# EAGLE board po6030k_plytka (EAGLE 4.13)
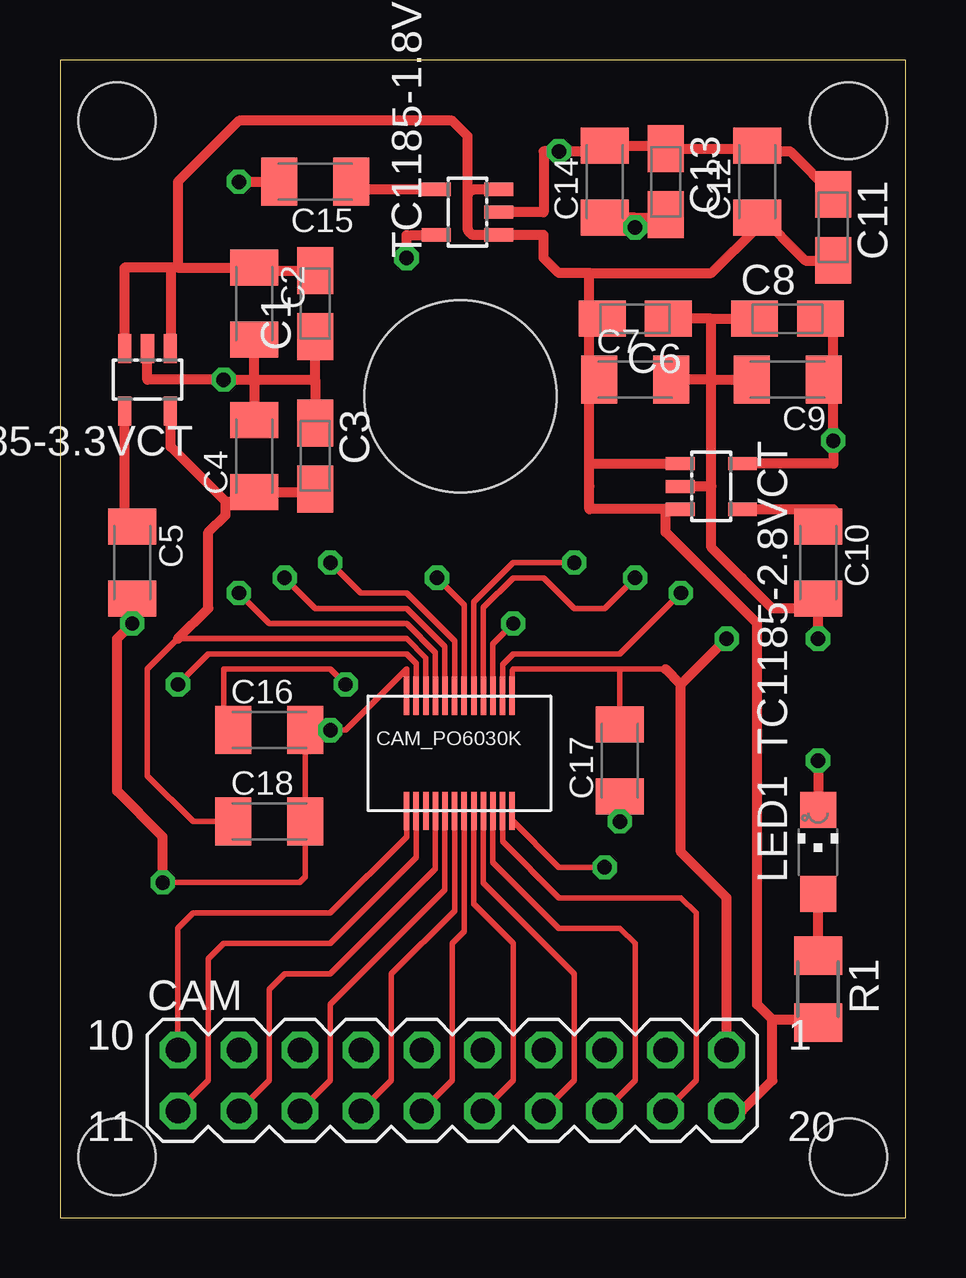
[diagram p0: board, top side]
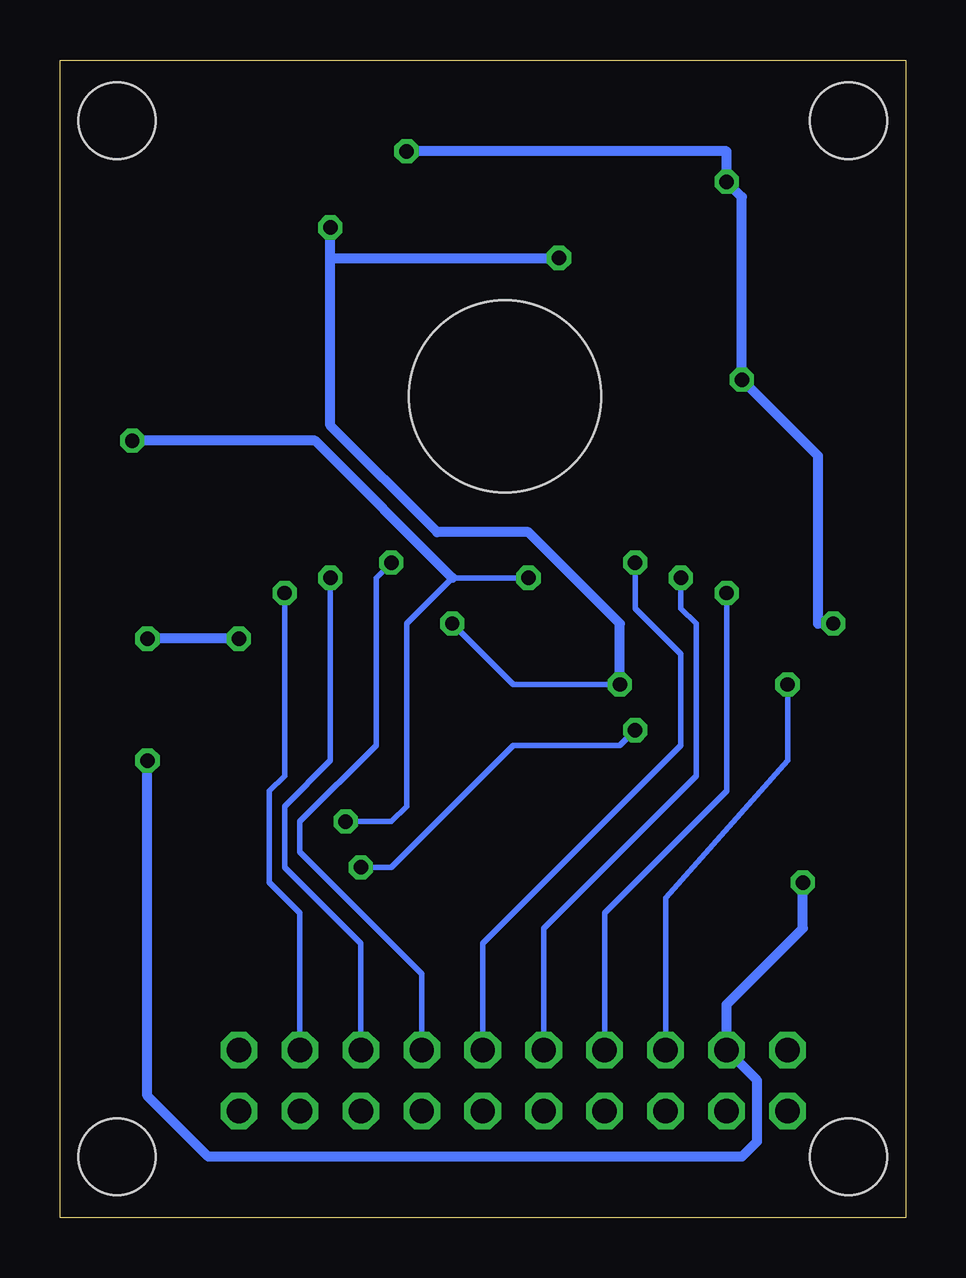
[diagram p1: board, bottom side, seen from below]

Size 35.23 x 48.25 mm. Coordinates in mm from the lower left corner, seen from the top.
Outline: 0,0 35.23,0 35.23,48.25 0,48.25 0,0
Copper layers (1*16): Top 0.035mm / dielectric 1.5mm / Bottom 0.035mm
Design rules "default": minimum track width 9mil, minimum drill 24mil, track to track 10mil, track to pad 10mil, pad to pad 8mil, via to via 8mil, smd to smd 0mil, copper to edge 40mil, drill to drill 8mil, minimum pad ring 10mil, minimum via ring 8mil, stop-mask expansion 4mil, vias tented up to drill 0mil, thermal gap 10mil
Holes 8 mm at 16.68,34.23
Holes 3.2 mm at 32.85,45.72 32.85,2.54 2.38,2.54 2.38,45.72

## Footprints (pad centres in the part's own frame; a part is rotated, then mirrored left to right if it is on the bottom)
A/3216-18R = smd 1.95 x 1.5: + 1.375,0; - -1.375,0
C1206K = smd 1.5 x 2: 1 -1.5,0; 2 1.5,0
MA10-2V2 = drill 1.016 octagon: 1 11.43,1.27; 2 8.89,1.27; 3 6.35,1.27; 4 3.81,1.27; 5 1.27,1.27; 6 -1.27,1.27; 7 -3.81,1.27; 8 -6.35,1.27; 9 -8.89,1.27; 10 -11.43,1.27; 11 -11.43,-1.27; 12 -8.89,-1.27; 13 -6.35,-1.27; 14 -3.81,-1.27; 15 -1.27,-1.27; 16 1.27,-1.27; 17 3.81,-1.27; 18 6.35,-1.27; 19 8.89,-1.27; 20 11.43,-1.27
KYOCERA24 = smd 0.23 x 1.6: P$1 4.4,0.8; P$2 4,0.8; P$3 3.6,0.8; P$4 3.2,0.8; P$5 2.8,0.8; P$6 2.4,0.8; P$7 2,0.8; P$8 1.6,0.8; P$9 1.2,0.8; P$10 0.8,0.8; P$11 0.4,0.8; P$12 0,0.8; P$13 0,-4; P$14 0.4,-4; P$15 0.8,-4; P$16 1.2,-4; P$17 1.6,-4; P$18 2,-4; P$19 2.4,-4; P$20 2.8,-4; P$21 3.2,-4; P$22 3.6,-4; P$23 4,-4; P$24 4.4,-4
CHIPLED_1206 = smd 1.5 x 1.5: A 0,-1.75; C 0,1.75
M1206 = smd 1.6 x 2: 1 -1.4,0; 2 1.4,0
SOT23-5 = smd 0.55 x 1.2: 1 -0.95,-1.3; 2 0,-1.3; 3 0.95,-1.3; 4 0.95,1.3; 5 -0.95,1.3

## Placement (x,y rotation side)
C1  1uF  [A/3216-18R]  10.63,38.09 90 top
C2  100nF  [C1206K]  8.09,38.09 270 top
C3  1uF  [A/3216-18R]  10.63,31.75 270 top
C4  100nF  [C1206K]  8.09,31.75 90 top
C5  450pF  [C1206K]  3.01,27.3 270 top
C6  1uF  [A/3216-18R]  23.96,37.46 180 top
C7  100nF  [C1206K]  23.96,34.92 0 top
C8  1uF  [A/3216-18R]  30.31,37.46 0 top
C9  100nF  [C1206K]  30.31,34.92 180 top
C10  450pF  [C1206K]  31.59,27.3 270 top
C11  1uF  [A/3216-18R]  32.22,41.27 270 top
C12  100nF  [C1206K]  29.04,43.17 90 top
C13  1uF  [A/3216-18R]  25.23,43.17 270 top
C14  100nF  [C1206K]  22.7,43.17 90 top
C15  450pF  [C1206K]  10.63,43.17 180 top
C16  100nF  [C1206K]  8.72,20.32 0 top
C17  100nF  [C1206K]  23.33,19.04 90 top
C18  100nF  [C1206K]  8.72,16.5 0 top
CAM  PO6030  [MA10-2V2]  16.34,5.71 0 top
CAM_PO6030K  CAM_PO6030K  [KYOCERA24]  14.44,20.95 0 top
LED1  [CHIPLED_1206]  31.59,15.24 0 top
R1  512  [M1206]  31.59,9.52 270 top
TC1185-1.8VCT  1.8V  [SOT23-5]  16.98,41.91 90 top
TC1185-2.8VCT  2.8V  [SOT23-5]  27.14,30.47 270 top
TC1185-3.3VCT  3.3V  [SOT23-5]  3.65,34.92 180 top

## Library data of the parts
C1-C18 R1 = rcl
CAM = con-lstb
CAM_PO6030K = moje_elementy
LED1 = led
TC1185-1.8VCT TC1185-2.8VCT TC1185-3.3VCT = v-reg-micrel

## Nets
+5V: C1.+ C2.1 C6.+ C7.1 C11.+ C12.1 CAM.20 R1.2 TC1185-1.8VCT.1 TC1185-1.8VCT.3 TC1185-2.8VCT.1 TC1185-2.8VCT.3 TC1185-3.3VCT.1 TC1185-3.3VCT.3
AGND: C6.- C7.2 C8.- C9.2 C10.2 C17.2 CAM.1 CAM_PO6030K.P$1 TC1185-2.8VCT.2
AGND2: CAM.10 CAM_PO6030K.P$13
AVDD: C8.+ C9.1 C17.1 CAM_PO6030K.P$6 TC1185-2.8VCT.5
D0: CAM.19 CAM_PO6030K.P$23
D1: CAM.18 CAM_PO6030K.P$22
D2: CAM.17 CAM_PO6030K.P$21
D3: CAM.16 CAM_PO6030K.P$20
D4: CAM.15 CAM_PO6030K.P$19
D5: CAM.14 CAM_PO6030K.P$18
D6: CAM.13 CAM_PO6030K.P$17
D7: CAM.12 CAM_PO6030K.P$16
DGND: C1.- C2.2 C3.- C4.2 C5.2 C11.- C12.2 C13.- C14.2 C15.2 C16.2 C18.2 CAM.9 CAM_PO6030K.P$12 CAM_PO6030K.P$24 LED1.C TC1185-1.8VCT.2 TC1185-3.3VCT.2
DVDD: C13.+ C14.1 C16.1 CAM_PO6030K.P$3 TC1185-1.8VCT.5
HSYNC: CAM.3 CAM_PO6030K.P$4
HVDD: C3.+ C4.1 C18.1 CAM_PO6030K.P$10 TC1185-3.3VCT.5
MCLK: CAM.2 CAM_PO6030K.P$2
N$2: C10.1 TC1185-2.8VCT.4
N$3: C15.1 TC1185-1.8VCT.4
N$9: LED1.A R1.1
N$26: C5.1 TC1185-3.3VCT.4
PCLK: CAM.8 CAM_PO6030K.P$11
RSTB: CAM.11 CAM_PO6030K.P$14
SCL: CAM.5 CAM_PO6030K.P$7
SDA: CAM.6 CAM_PO6030K.P$8
STDBY: CAM.4 CAM_PO6030K.P$5
VSYNC: CAM.7 CAM_PO6030K.P$9

## Tracks (layer width: path | path; a pad name or v marks a point on that pad's centre or on a via)
+5V
  Top 0.406: TC1185-3.3VCT.3 2.68,39.59 4.61,39.59 4.61,39.57 | TC1185-3.3VCT.1 | TC1185-3.3VCT.1 | 4.61,39.57 TC1185-3.3VCT.1 | 8.09,39.47 C2.1 4.92,39.59 | 8.09,39.47 C1.+ | 8.09,39.47 8.09,39.37 | 4.92,39.59 4.61,39.59 4.61,39.57 | 25.23,29.53 22.06,29.53 22.06,30.47 | 25.23,29.53 TC1185-2.8VCT.3 | TC1185-2.8VCT.1 22.06,31.43 22.06,30.47 | 22.06,30.47 22.06,34.92 | 22.06,34.92 C7.1 | 22.06,34.92 22.06,37.46 | 22.7,37.46 C6.+ 22.06,37.46 | TC1185-1.8VCT.3 17.29,42.86 arc90 16.98,42.54 16.98,41.27 | 16.98,41.27 arc90 17.29,40.95 TC1185-1.8VCT.1 20.16,40.95 20.16,40 20.79,39.37 22.06,39.37 | CAM.20 28.41,4.44 29.68,5.71 29.68,8.25 | 29.68,8.25 29.04,8.89 29.04,24.76 25.23,28.57 25.23,29.53 | 22.06,39.37 27.14,39.37 29.04,41.27 C12.1 29.04,41.91 31.05,39.9 C11.+ | 22.06,37.46 22.06,39.37 | 16.98,41.27 16.98,45.08 16.34,45.72 7.46,45.72 4.92,43.17 4.92,39.59 | R1.2 31.59,7.61 30.95,8.25 29.68,8.25
AGND  (via drill 0.6)
  Top 0.229: CAM_PO6030K.P$1 18.84,22.81 18.88,22.86 23.33,22.86 | 23.33,20.32 C17.2 23.33,22.86 | 25.23,22.86 23.33,22.86
  Top 0.406: 27.14,30.47 TC1185-2.8VCT.2 | 27.14,30.47 27.14,34.92 | 25.23,34.92 C7.2 27.14,34.92 | 27.14,37.46 C6.- | 27.14,34.92 27.14,37.46 | 27.14,37.46 C8.- | 27.14,34.92 C9.2 | 27.14,30.47 27.14,27.93 28.41,26.67 29.68,25.39 31.59,25.39 | C10.2 32.22,25.39 31.59,25.39 | CAM.1 27.77,13.33 25.87,15.24 25.87,22.22 | 25.87,22.22 25.23,22.86 | v31.59,24.13 31.59,25.39 | 25.87,22.22 v27.77,24.13
  Bottom 0.406: v27.77,24.13 v31.59,24.13
AGND2
  Top 0.229: CAM_PO6030K.P$13 14.44,15.87 11.27,12.7 5.55,12.7 4.92,12.06 CAM.10
AVDD  (via drill 0.6)
  Top 0.229: v23.33,16.5 C17.1 | CAM_PO6030K.P$6 16.84,25.54 v15.71,26.67
  Top 0.406: TC1185-2.8VCT.5 32.22,31.43 v32.22,32.38 32.22,34.92 | 32.22,34.92 C9.1 | 32.22,34.92 32.22,37.46 C8.+ 31.59,37.46
  Bottom 0.229: v15.71,26.67 18.88,26.67 20.79,24.76 20.79,17.14 21.43,16.5 v23.33,16.5
  Bottom 0.406: v32.22,32.38 24.6,32.38 18.88,26.67
D0
  Top 0.229: CAM_PO6030K.P$23 18.44,15.68 20.79,13.33 25.87,13.33 26.5,12.7 26.5,5.71 CAM.19
D1
  Top 0.229: CAM_PO6030K.P$22 18.04,14.81 20.79,12.06 23.33,12.06 23.96,11.43 23.96,5.71 CAM.18
D2
  Top 0.229: CAM_PO6030K.P$21 17.64,13.94 21.43,10.15 21.43,5.71 CAM.17
D3
  Top 0.229: CAM_PO6030K.P$20 17.24,13.07 18.88,11.43 18.88,5.71 CAM.16
D4
  Top 0.229: CAM_PO6030K.P$19 16.84,11.92 16.34,11.43 16.34,5.71 CAM.15
D5
  Top 0.229: CAM_PO6030K.P$18 16.44,12.79 13.8,10.15 13.8,5.71 CAM.14
D6
  Top 0.229: CAM_PO6030K.P$17 16.04,13.66 11.27,8.89 11.27,5.71 CAM.13
D7
  Top 0.229: CAM_PO6030K.P$16 15.64,14.53 11.27,10.15 9.36,10.15 8.72,9.52 8.72,5.71 CAM.12
DGND  (via drill 0.6)
  Top 0.229: C16.2 10.22,16.74 9.99,16.5 C18.2 10.22,14.2 9.99,13.96 v4.28,13.96 | CAM_PO6030K.P$24 18.84,16.55 20.79,14.6 v22.7,14.6 | CAM_PO6030K.P$12 14.44,22.86 11.9,20.32 v11.27,20.32 C16.2 | C16.2 9.99,20.32
  Top 0.406: TC1185-3.3VCT.2 3.65,34.92 v6.82,34.92 8.09,34.92 | 10.63,33.02 C3.- 10.63,34.92 | 10.63,34.92 C1.- | 8.09,34.92 C2.2 | 8.09,34.92 10.63,34.92 | 8.09,33.02 C4.2 8.09,34.92 | C5.2 v3.01,24.76 2.38,24.13 2.38,17.78 4.28,15.87 v4.28,13.96 | TC1185-1.8VCT.2 20.16,41.91 20.16,44.45 v20.79,44.45 22.7,44.45 C14.2 25,44.67 25.23,44.45 C13.- 28.94,44.55 29.04,44.45 | v7.46,43.17 C15.2 | v31.59,19.04 LED1.C | 29.04,44.45 C12.2 | C11.- 30.42,44.45 29.04,44.45
  Bottom 0.229: v22.7,14.6 21.43,14.6 16.34,19.68 11.9,19.68 v11.27,20.32
  Bottom 0.406: v3.01,24.76 3.65,24.76 3.65,31.75 v6.82,34.92 6.82,42.54 v7.46,43.17 7.46,44.45 v20.79,44.45 | v4.28,13.96 4.28,12.06 7.46,8.89 CAM.9 6.19,5.71 6.19,3.17 6.82,2.54 29.04,2.54 31.59,5.07 v31.59,19.04
DVDD  (via drill 0.6)
  Top 0.229: CAM_PO6030K.P$3 18.04,23.92 v18.88,24.76 | v11.9,22.22 11.27,22.86 6.82,22.86 6.82,20.32 C16.1
  Top 0.406: TC1185-1.8VCT.5 14.44,40.95 v14.44,40 | 22.93,41.67 C14.1 23.96,41.67 | C13.+ 25.13,41.8 | C13.+ 25.23,41.91 | 25.23,41.67 C13.+ | 23.96,41.67 25.23,41.67 | 25.23,41.67 25.23,41.27 | v23.96,41.27 23.96,41.67
  Bottom 0.229: v18.88,24.76 16.34,22.22 v11.9,22.22
  Bottom 0.406: 23.96,40 23.96,33.02 19.52,28.57 15.71,28.57 11.9,24.76 v11.9,22.22 | 23.96,40 v23.96,41.27 | 23.96,40 v14.44,40
HSYNC  (via drill 0.6)
  Top 0.229: CAM_PO6030K.P$4 17.64,25.42 18.88,26.67 20.16,26.67 21.43,25.39 22.7,25.39 v23.96,26.67
  Bottom 0.229: v23.96,26.67 23.96,19.04 25.87,17.14 25.87,14.6 22.7,11.43 CAM.3
HVDD
  Top 0.229: CAM_PO6030K.P$10 15.24,23.32 14.44,24.13 4.92,24.13 3.65,22.86 3.65,18.41 5.55,16.5 C18.1 7.46,16.5
  Top 0.406: TC1185-3.3VCT.5 4.61,32.13 6.9,29.84 | 8.32,30.17 8.32,30.25 C4.1 8.72,30.25 | 10.68,30.25 10.68,30.37 C3.+ | 8.72,30.25 10.68,30.25 | 10.68,30.25 10.68,30.22 | 8.72,30.25 8.72,29.84 6.9,29.84 | 6.9,29.84 6.9,29.28 6.19,28.57 6.19,25.39 4.92,24.13
MCLK  (via drill 0.6)
  Top 0.229: CAM_PO6030K.P$2 18.44,23.04 18.88,23.49 23.33,23.49 v25.87,26.03
  Bottom 0.229: v25.87,26.03 25.87,18.41 26.5,17.78 26.5,13.96 25.23,12.7 CAM.2
N$1
  Top 0.406: 22.7,41.27 22.7,41.91
N$2
  Top 0.406: 32.22,28.57 C10.1 32.22,29.53 TC1185-2.8VCT.4
N$3
  Top 0.406: C15.1 11.9,43.17 11.9,42.86 TC1185-1.8VCT.4
N$9
  Top 0.406: R1.1 LED1.A
N$26
  Top 0.406: C5.1 3.01,28.57 2.69,28.57 TC1185-3.3VCT.4
PCLK  (via drill 0.6)
  Top 0.229: CAM_PO6030K.P$11 14.84,23.09 14.44,23.49 6.19,23.49 v4.92,22.22
  Bottom 0.229: v4.92,22.22 4.92,19.04 9.99,13.33 CAM.8
RSTB
  Top 0.229: CAM.11 6.19,5.71 6.19,10.79 6.82,11.43 11.27,11.43 14.84,15 CAM_PO6030K.P$14
SCL  (via drill 0.6)
  Top 0.229: CAM_PO6030K.P$7 16.44,24.03 14.44,26.03 12.54,26.03 v11.27,27.3
  Bottom 0.229: CAM.5 17.61,11.43 9.36,19.68 9.36,23.49 11.27,25.39 v11.27,27.3
SDA  (via drill 0.6)
  Top 0.229: CAM_PO6030K.P$8 16.04,23.79 14.44,25.39 10.63,25.39 v9.36,26.67
  Bottom 0.229: CAM.6 15.07,12.06 8.72,18.41 8.72,24.76 9.36,25.39 v9.36,26.67
STDBY  (via drill 0.6)
  Top 0.229: CAM_PO6030K.P$5 17.24,25.65 18.88,27.3 v21.43,27.3
  Bottom 0.229: CAM.4 20.16,10.15 25.23,15.24 25.23,16.5 22.06,19.68 22.06,26.67 v21.43,27.3
VSYNC  (via drill 0.6)
  Top 0.229: CAM_PO6030K.P$9 15.64,23.56 14.44,24.76 8.72,24.76 v7.46,26.03
  Bottom 0.229: v7.46,26.03 7.46,17.78 12.54,12.7 CAM.7

## Text on the board
OPISY_TOP: CAM PO6030K by PAWEL KMAK | 1.8V | + | + | + | 3.3V | + | + | + | 2.8V | + | 10 | 1 | 5V | 11 | 20